# EAGLE board s (EAGLE 7.2.0)
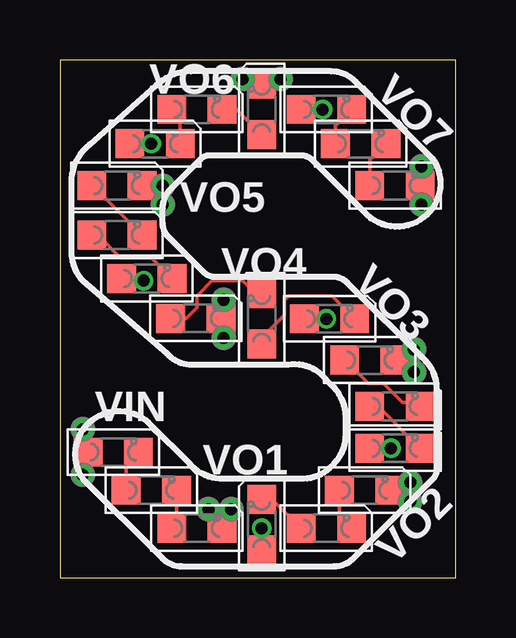
[diagram p0: board, top side]
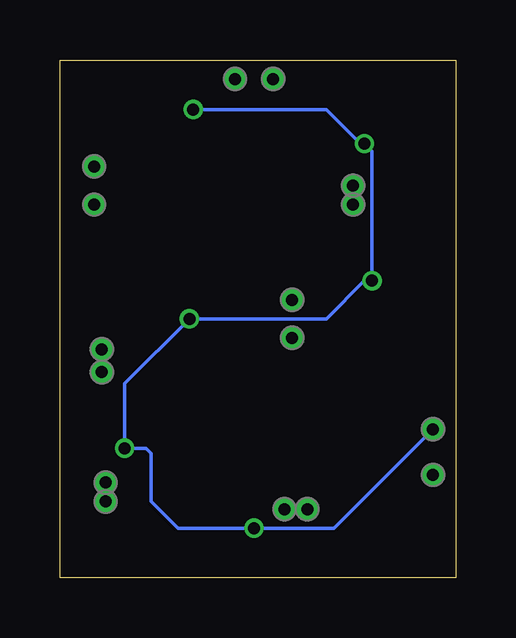
[diagram p1: board, bottom side, seen from below]

Size 16.51 x 21.59 mm. Coordinates in mm from the lower left corner, seen from the top.
Outline: 0,0 16.51,0 16.51,21.59 0,21.59 0,0
Copper layers (1*16): Top 0.035mm / dielectric 1.5mm / Bottom 0.035mm
Design rules "Fusion_eagle_rule_v1.1_tms *": minimum track width 6mil, minimum drill 12mil, track to track 6mil, track to pad 6mil, pad to pad 6mil, via to via 6mil, smd to smd 0mil, copper to edge 10mil, drill to drill 10mil, minimum pad ring 10mil, minimum via ring 6mil, stop-mask expansion 2mil, vias tented up to drill 100mil, thermal gap 10mil

## Footprints (pad centres in the part's own frame; a part is rotated, then mirrored left to right if it is on the bottom)
LED_0805 = smd 1.2 x 1.2: A 0,-1.05; C 0,1.05
P1-20 = drill 0.5: TP 0,0

## Placement (x,y rotation side)
LED1  [LED_0805]  2.22,5.24 270 top
LED2  [LED_0805]  3.81,3.65 270 top
LED3  [LED_0805]  5.71,2.06 270 top
LED4  [LED_0805]  8.41,2.22 0 top
LED5  [LED_0805]  11.11,2.06 270 top
LED6  [LED_0805]  12.7,3.65 270 top
LED7  [LED_0805]  13.97,5.4 270 top
LED8  [LED_0805]  13.97,7.14 270 top
LED9  [LED_0805]  12.92,9.08 270 top
LED10  [LED_0805]  11.24,10.79 270 top
LED11  [LED_0805]  8.41,10.79 0 top
LED12  [LED_0805]  5.67,10.81 270 top
LED13  [LED_0805]  3.62,12.48 270 top
LED14  [LED_0805]  2.38,14.29 270 top
LED15  [LED_0805]  2.38,16.35 270 top
LED16  [LED_0805]  3.97,18.1 270 top
LED17  [LED_0805]  5.71,19.53 270 top
LED18  [LED_0805]  8.41,19.53 0 top
LED19  [LED_0805]  11.11,19.53 270 top
LED20  [LED_0805]  12.54,18.1 270 top
LED21  [LED_0805]  13.97,16.35 270 top
VIN  [P1-20]  0.95,4.29 0 top
VIN1  [P1-20]  0.95,6.19 0 top
VO1  [P1-20]  7.14,2.86 0 top
VO2  [P1-20]  14.61,3.17 0 top
VO3  [P1-20]  14.76,8.57 0 top
VO4  [P1-20]  6.83,10 0 top
VO5  [P1-20]  4.29,16.35 0 top
VO6  [P1-20]  7.62,20.8 0 top
VO7  [P1-20]  15.08,15.56 0 top
VO08  [P1-20]  6.19,2.86 0 top
VO09  [P1-20]  14.61,3.97 0 top
VO10  [P1-20]  14.76,9.53 0 top
VO11  [P1-20]  6.83,11.59 0 top
VO12  [P1-20]  4.29,15.56 0 top
VO13  [P1-20]  9.21,20.8 0 top
VO14  [P1-20]  15.08,17.14 0 top

## Library data of the parts
LED1-LED21 VIN VIN1 VO1-VO7 VO08 VO09 VO10-VO14 = CyberRailGuru

## Nets
N$1: LED19.C LED20.A
N$2: LED20.C LED21.A
N$39: LED2.C LED3.A
N$40: LED1.C LED2.A
N$41: LED5.C LED6.A
N$42: LED4.C LED5.A
N$43: LED8.C LED9.A
N$44: LED7.C LED8.A
N$45: LED11.C LED12.A
N$46: LED10.C LED11.A
N$47: LED14.C LED15.A
N$48: LED13.C LED14.A
N$49: LED17.C LED18.A
N$50: LED16.C LED17.A
VIN: LED1.A LED4.A LED7.A LED10.A LED13.A LED16.A LED19.A VIN1.TP VIN.TP
VOUT1: LED3.C VO1.TP VO08.TP
VOUT2: LED6.C VO2.TP VO09.TP
VOUT3: LED9.C VO3.TP VO10.TP
VOUT4: LED12.C VO4.TP VO11.TP
VOUT5: LED15.C VO5.TP VO12.TP
VOUT6: LED18.C VO6.TP VO13.TP
VOUT7: LED21.C VO7.TP VO14.TP

## Tracks (layer width: path | path; a pad name or v marks a point on that pad's centre or on a via)
N$1
  Top 0.152: LED20.A 11.49,18.86 LED19.C
N$2
  Top 0.152: LED21.A 12.92,17.43 LED20.C
N$39
  Top 0.152: LED2.C 4.86,2.26 LED3.A
N$40
  Top 0.152: LED2.A 2.76,4.73 3.27,4.73 LED1.C
N$41
  Top 0.152: LED6.A 11.65,2.58 LED5.C
N$42
  Top 0.152: LED4.C 8.85,3.27 LED5.A
N$43
  Top 0.152: LED9.A 12.2,8.92 12.2,8.76 12.86,8.1 13.49,8.1 14.29,7.3 14.86,7.3 LED8.C
N$44
  Top 0.152: LED8.A 13.27,7.14 LED7.C
N$45
  Top 0.152: LED12.A 5.26,10.81 5.71,11.27 5.71,11.75 6.35,12.38 7.62,12.38 8.16,11.85 LED11.C
N$46
  Top 0.152: LED11.A 8.41,10 9.37,10.95 9.37,11.59 9.53,11.75 11.34,11.75 LED10.C
N$47
  Top 0.152: LED15.A 1.37,16.35 LED14.C
N$48
  Top 0.152: LED14.A 1.59,14.29 2.54,13.34 3.81,13.34 LED13.C
N$49
  Top 0.152: LED17.C 7.36,19.53 LED18.A
N$50
  Top 0.152: LED17.A 5.02,19.53 LED16.C
VIN  (via drill 0.5)
  Top 0.152: 9.68,19.15 LED19.A v10.95,19.53 | VIN.TP 0.95,5.02 LED1.A 0.95,5.46 VIN1.TP | LED4.A v8.41,2.06 | v13.81,5.4 LED7.A | LED10.A v11.11,10.79 | LED13.A 3.4,12.47 v3.49,12.38 | LED16.A v3.81,18.1
  Bottom 0.152: VIN1.TP 5.08,2.06 v8.41,2.06 11.59,2.06 12.7,3.17 12.7,5.18 LED7.A v13.81,5.4 13.81,8.1 v11.11,10.79 5.4,10.79 3.81,12.38 v3.49,12.38 3.49,17.78 v3.81,18.1 3.97,18.1 5.4,19.53 v10.95,19.53
VOUT1
  Top 0.152: LED3.C 6.19,2.64 VO08.TP VO1.TP
VOUT2
  Top 0.152: LED6.C 14.29,3.65 VO09.TP VO2.TP
VOUT3
  Top 0.152: LED9.C 14.26,9.08 VO3.TP VO10.TP
VOUT4
  Top 0.152: VO11.TP 6.83,10.92 LED12.C 6.83,10.71 VO4.TP
VOUT5
  Top 0.152: LED15.C VO5.TP VO12.TP
VOUT6
  Top 0.152: LED18.C 8.35,20.8 VO6.TP | 8.47,20.8 LED18.C | VO13.TP 8.63,20.8 LED18.C
VOUT7
  Top 0.152: VO14.TP 15.08,16.41 LED21.C 15.08,16.29 VO7.TP

## Text on the board
201bmp: S